# Altium PCB can_12V_step_Ivan.PcbDoc
Units mm, origin at the board's own origin, x right, y up, seen from the top; angles counter-clockwise.
Board outline 55 x 55 mm, 2 copper layers (Top Layer, Bottom Layer); 54 components, 43 nets, 233 pads, 17 vias.
Unrouted connection lines stored in the file: 116.
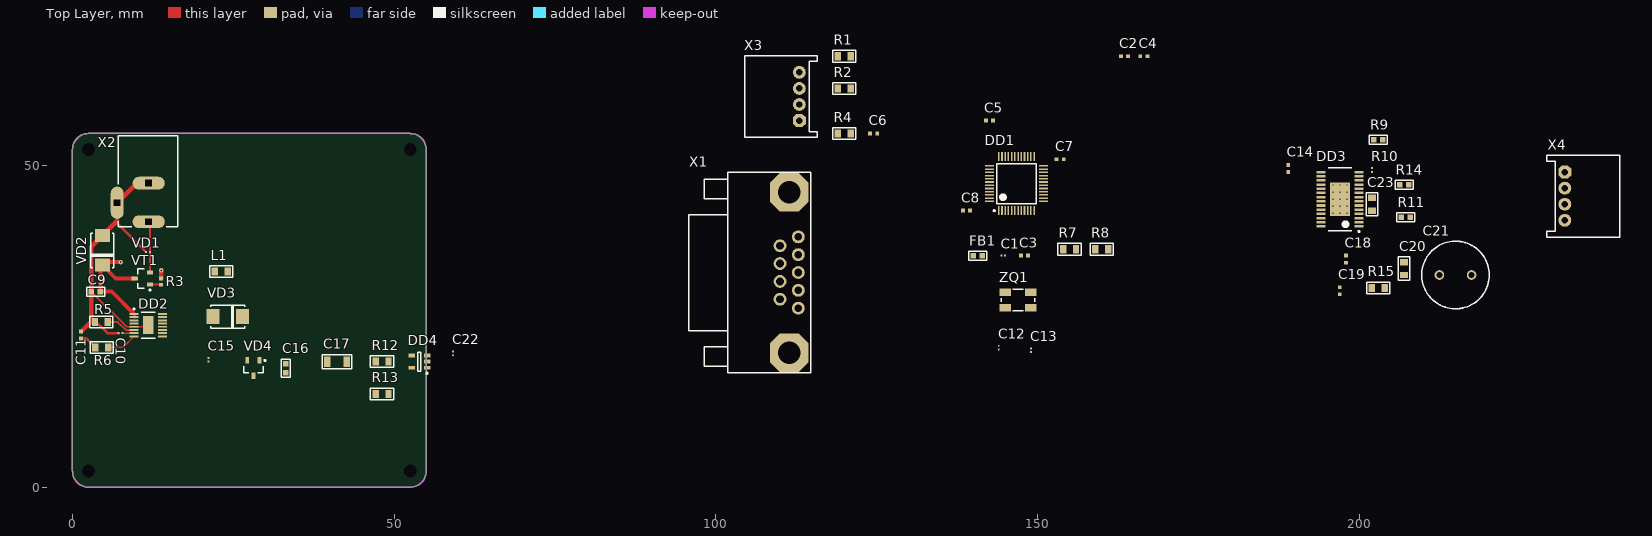
[diagram p0: Top Layer view]
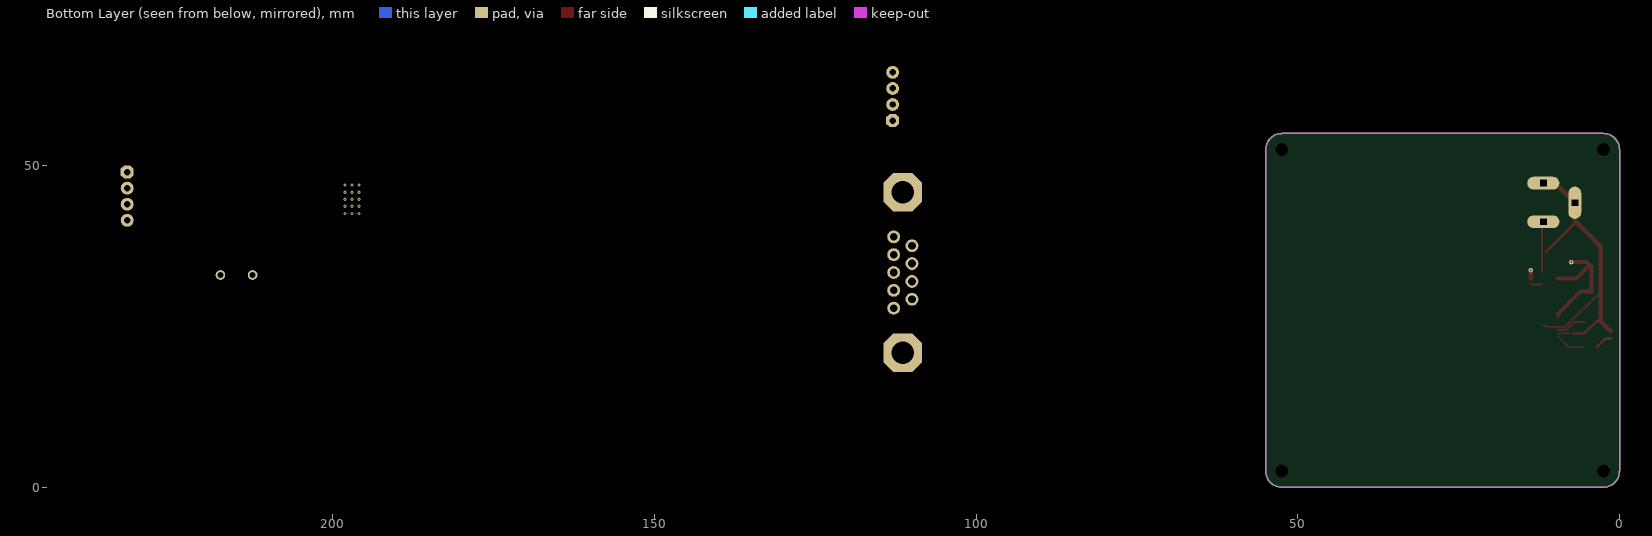
[diagram p1: Bottom Layer view, seen from below]

## Layer stack, top to bottom
Top Solder: solder mask 0.0102, Solder Resist, Dk 3.5
Top Layer: signal copper 0.0356
Dielectric 1: dielectric 0.32, FR-4, Dk 4.8
Bottom Layer: signal copper 0.0356
Bottom Solder: solder mask 0.0102, Solder Resist, Dk 3.5

## Board outline
2.499,0 cw(c2.499,2.492) 0.007,2.492 0,2.5 0,52.5 0,52.501 cw(c2.492,52.501) 2.492,54.993 2.5,55 52.5,55 52.5,54.992 cw(c52.5,52.5) 54.992,52.5 55,52.5 55,2.5 54.992,2.5 cw(c52.5,2.5) 52.5,0.008 52.5,0

## Design rules (kind name [scope] priority, off if disabled: settings)
Clearance [All] p1: gap=0.254 ignorepadtopadclearanceinfootprint=FALSE except(0: Arc-Hole Track-Hole SMDPad-Hole THPad-Hole Via-Hole Fill-Hole Poly-Hole Region-Hole Text-Hole)
PolygonConnect [All] p1: connectstyle=Relief reliefconductorwidth=0.254 reliefentries=4 polygonreliefangle="90 Angle" airgapwidth=0.254
RoutingVias [All] p1: holewidth=0.711 width=1.27 viastyle="Through Hole" minholewidth=0.711 minwidth=1.27 maxholewidth=0.711 maxwidth=1.27
SolderMaskExpansion [All] p1: expansion=0.102
Width [All] p1: maxlimit=1 minlimit=0.25 preferedwidth=0.3
30 further rules are at their usual default settings.

## Components (designator, comment, footprint, x,y, rotation, side; value= is the part's Value field where it differs from the comment)
C1 "Capacitor" CH0201C 144.7,36 r0 top
C2 "Capacitor" CH0402C 163.55,67 r0 top
C3 "Capacitor" CH0402C 148,36 r0 top
C4 "Capacitor" CH0402C 166.55,67 r0 top
C5 "Capacitor" CH0402C 142.55,57 r0 top
C6 "Capacitor" CH0402C 124.55,55 r0 top
C7 "Capacitor" CH0402C 153.55,51 r0 top
C8 "Capacitor" CH0402C 139,43 r0 top
C9 "Capacitor" CH0603C 3.65,30.425 r180 top
C10 "Capacitor" CH0201C 7.45,23.95 r180 top
C11 "Capacitor" CH0402C 1.35,23.675 r90 top
C12 "Capacitor" CH0201C 144,21.7 r90 top
C13 "Capacitor" CH0201C 149,21.3 r90 top
C14 "Capacitor" CH0402C 189,49.55 r90 top
C15 "Capacitor" CH0201C 21.125,19.825 r90 top
C16 "Capacitor" CH0603C 33.125,18.525 r90 top
C17 "Capacitor" CH1206C 41.125,19.525 r0 top
C18 "Capacitor" CH0402C 198,35.45 r90 top
C19 "Capacitor" CH0402C 197,30.55 r90 top
C20 "Capacitor" CH0805C 207,34 r90 top
C21 "Capacitor_Passing" RB5-10.5 215,33 r0 top
C22 "Capacitor" CH0201C 59.125,20.825 r90 top
C23 "Capacitor" CH0805C 202,44 r90 top
DD1 "STM32F103C8T6" "STM32F103 48pins" 146.75,47.2 r90 top
DD2 "LT3697" LT3697 11.775,25.2 r0 top
DD3 "DRV8825" DRV8825 197.05,44.775 r180 top
DD4 "TLV755P" SOT23-5 53.925,19.525 r180 top
FB1 "Ferrite bead" CH0603L 140.7,36 r0 top
L1 "*" CH0805L 23.125,33.525 r0 top
R1 "Res_0.125" CH0805R 120,67 r0 top
R2 "Res_0.125" CH0805R 120,62 r0 top
R3 "Res_0.125" CH0402R 13.775,31.975 r270 top
R4 "Res_0.125" CH0805R 120,55 r0 top
R5 "Res_0.125" CH0805R 4.5,25.675 r180 top
R6 "Res_0.125" CH0805R 4.55,21.75 r180 top
R7 "Res_0.125" CH0805R 155,37 r0 top
R8 "Res_0.125" CH0805R 160,37 r0 top
R9 "Res_0.125" CH0603R 203,54 r0 top
R10 "Res_0.05" CH0201R 202,49.3 r90 top
R11 "Res_1" CH0603R 207.3,42 r0 top
R12 "Res_0.125" CH0805R 48.125,19.525 r0 top
R13 "Res_0.125" CH0805R 48.125,14.525 r0 top
R14 "Res_1" CH0603R 207,47 r180 top
R15 "Res_0.5" CH0805R 203,31 r0 top
VD1 "TVS-diod_simmetrical" CH0201L 11.725,36.575 r0 top
VD2 "TVS-diod_directed" DO214AA 4.65,36.825 r270 top
VD3 "Diod Schottky" DO214AA 24.125,26.525 r0 top
VD4 "Diod Schottky" SOT23_132 28.125,18.525 r270 top
VT1 "*" SOT23_132 10.85,32.45 r180 top
X1 "DB-9" "CON: DB-9F" 111.42,33.385 r0 top
X2 "2_pins" "CON: 163-179PH-EX" 11.85,54.975 r270 top
X3 "4_pins" "CON: CWF-4R" 113,60.75 r90 top
X4 "STEPPER MOTOR" "CON: CWF-4R" 232,45.25 r270 top
ZQ1 "Oscillator" "OSC: 5032" 147,29.1 r0 top

## Footprints (in the part's own frame and the unit in brackets; to place one, negate y for a bottom-side part, rotate by r counter-clockwise, add the part's x,y. Pads: shape width x height; smd on the part's side, far side on the other; paste and mask are expansions set on the pad)
CH0201C [mm]
  rect 0.3x0.3 smd: 1(-0.3,0) 2(0.3,0)
  body extent -0.3,-0.15 0.3,0.15, height 0.31
CH0201L [mm]
  rect 0.3x0.3 smd: 1(-0.3,0) 2(0.3,0)
  body extent -0.3,-0.15 0.3,0.15, height 0.3
CH0201R [mm]
  rect 0.3x0.3 smd: 1(-0.3,0) 2(0.3,0)
  body extent -0.3,-0.15 0.3,0.15, height 0.22
CH0402C [mm]
  rect 0.6x0.6 smd: 1(-0.55,0) 2(0.55,0)
  body extent -0.51,-0.25 0.51,0.25, height 0.51
CH0402R [mm]
  rect 0.6x0.6 smd: 1(-0.5,0) 2(0.5,0)
  body extent -0.52,-0.25 0.47,0.25, height 0.34
CH0603C [mm] "Chip Capacitor, 2-Leads, Body 1,53x0,85mm, IPC Medium Density"
  rect 0.85x0.85 smd: 1(-0.7,0) 2(0.7,0)
  silkscreen extent -1.4,-0.7 1.4,0.7, body extent -0.8,-0.4 0.8,0.4, height 0.3
CH0603L [mm]
  rect 0.85x0.85 smd: 1(-0.7,0) 2(0.7,0)
  silkscreen extent -1.4,-0.7 1.4,0.7, body extent -0.8,-0.4 0.8,0.4, height 0.8
CH0603R [mm]
  rect 0.85x0.85 smd: 1(-0.7,0) 2(0.7,0)
  silkscreen extent -1.4,-0.7 1.4,0.7, body extent -0.8,-0.4 0.8,0.4, height 0.44
CH0805C [mm] "Chip Capacitor, 2-Leads, Body 2,00x1,20mm, IPC Medium Density"
  rect 1x1.25 smd: 1(-1,0) 2(1,0)
  silkscreen extent -1.8,-0.9 1.8,0.9, body extent -1,-0.62 1,0.63, height 0.78
CH0805L [mm]
  rect 1x1.25 smd: 1(-1,0) 2(1,0)
  silkscreen extent -1.8,-0.9 1.8,0.9, body extent -1,-0.62 1,0.63, height 0.85
CH0805R [mm]
  rect 1x1.25 smd: 1(-1,0) 2(1,0)
  silkscreen extent -1.8,-0.9 1.8,0.9, body extent -1,-0.6 1,0.6, height 0.44
CH1206C [mm] "Non polar chip capacitor, size 1206"
  rect 1x1.6 smd: 1(-1.5,0) 2(1.5,0)
  silkscreen extent -2.3,-1.1 2.3,1.1, body extent -1.6,-0.8 1.6,0.8, height 1
"CON: 163-179PH-EX" [mm]
  oval 2x5 hole 1 square: 1(13.7,0) 2(7.7,0)
  oval 5x2 hole 1 square: 2(10.75,-4.9)
  round 0.5 on Mech1: ""(14,-3)
  silkscreen extent 0.3,-4.72 14.5,4.5, body extent 0,-5 14.4,4.4, height 11.05
"CON: CWF-4R" [mm]
  oct 2x2 hole 1: 1(-3.75,0)
  round 2 hole 1: 2(-1.25,0) 3(1.25,0) 4(3.75,0)
  round 0.5 on Mech1: ""(-5.6,-2.2)
  round 0.5 on Top Overlay: ""(-5,-1)
  silkscreen extent -6.38,-2.8 6.35,8.5, body extent -6.25,-2.7 6.25,8.8, height 5.75
"CON: DB-9F" [mm]
  round 2 hole 1.2: 1(1.42,-5.54) 2(1.42,-2.77) 3(1.42,0) 4(1.42,2.77) 5(1.42,5.54) 6(-1.42,-4.155) 7(-1.42,-1.385) 8(-1.42,1.385) 9(-1.42,4.155)
  oct 6x6 hole 3.5: G1(0,12.5) G2(0,-12.5)
  silkscreen extent -15.58,-15.62 3.32,15.62, body extent -15.3,-15.4 3,15.41, height 12.52
DO214AA [mm] "SMB"
  rect 2x2.3 smd: 1(-2.3,0) 2(2.3,0)
  round 0.5 on Mech1: ""(2.1,1.3)
  silkscreen extent -2.67,-1.78 2.67,1.78, body extent -2.7,-1.8 2.7,1.8, height 2.3
DRV8825 [mm] "SOP127P600-8N"
  rect 1.4x0.4 smd: 1(-2.95,4.225) 2(-2.95,3.575) 3(-2.95,2.925) 4(-2.95,2.275) 5(-2.95,1.625) 6(-2.95,0.975) 7(-2.95,0.325) 8(-2.95,-0.325) 9(-2.95,-0.975) 10(-2.95,-1.625) 11(-2.95,-2.275) 12(-2.95,-2.925) 13(-2.95,-3.575) 14(-2.95,-4.225) 15(2.95,-4.225) 16(2.95,-3.575) 17(2.95,-2.925) 18(2.95,-2.275) 19(2.95,-1.625) 20(2.95,-0.975) 21(2.95,-0.325) 22(2.95,0.325) 23(2.95,0.975) 24(2.95,1.625) 25(2.95,2.275) 26(2.95,2.925) 27(2.95,3.575) 28(2.95,4.225)
  rect 3.1x5.18 smd: 29(0,0)
  silkscreen extent -3.08,-4.9 1.85,5.12, body extent -3.2,-4.9 3.2,4.9, height 1.2
LT3697 [mm] "TSSOP, 16-Leads, Body 4,00x3,00mm, Pitch 0,50mm, Thermal Pad 2,80x1,60mm, IPC Medium Density"
  rect 1.4x0.3 smd: 1(-2.2,1.75) 2(-2.2,1.25) 3(-2.2,0.75) 4(-2.2,0.25) 5(-2.2,-0.25) 6(-2.2,-0.75) 7(-2.2,-1.25) 8(-2.2,-1.75) 9(2.2,-1.75) 10(2.2,-1.25) 11(2.2,-0.75) 12(2.2,-0.25) 13(2.2,0.25) 14(2.2,0.75) 15(2.2,1.25) 16(2.2,1.75)
  rect 1.6x2.8 smd: 17(0,0)
  silkscreen extent -2.32,-2 1.1,2.62, body extent -2.44,-2 2.44,2, height 1.1
"OSC: 5032" [mm]
  round 0.5 on Top Overlay: 1(-2.6,-2.2)
  rect 1.8x1.2 smd: 1(-2,-1.2) 2(2,-1.2) 3(2,1.2) 4(-2,1.2)
  round 0.5 on Mech1: ""(-2,-1.1)
  silkscreen extent -2.6,-1.7 2.6,1.7, body extent -2.5,-1.59 2.5,1.59, height 1.1
RB5-10.5 [mm] "Capacitor (Radial); 2 Leads"
  round 1.5 hole 0.9: 1(-2.5,0) 2(2.5,0)
  silkscreen extent -5.25,-5.25 5.25,5.25
SOT23-5 [mm] "SOT23, 5-Leads, Body 2,90x2,80mm, Pitch 0,95mm, IPC Medium Density"
  rect 1x0.6 smd: 1(-1.2,0.95) 2(-1.2,0) 3(-1.2,-0.95) 4(1.2,-0.95) 5(1.2,0.95)
  round 0.5 on Mech1: ""(-1.1,1.1)
  silkscreen extent -1.33,-1.5 0.25,1.92, body extent -1.5,-1.5 1.5,1.5, height 1.3
SOT23_132 [mm] "SOT23, 3-Leads, Body 3,0x2,6mm (max), Pitch 0,95mm, IPC Medium Density"
  rect 1x0.6 smd: 1(-1.2,0.95) 2(-1.2,-0.95) 3(1.2,0)
  round 0.5 on Mech1: ""(-0.9,1.1)
  silkscreen extent -1.32,-1.5 0.7,1.92, body extent -1.32,-1.52 1.32,1.52, height 1.12
"STM32F103 48pins" [mm] "TSQFP, 48-Leads, Body 7,00x7,00mm, Pitch 0,50mm, IPC Medium Density"
  rect 1.4x0.25 smd: 1(-4.2,2.75) 2(-4.2,2.25) 3(-4.2,1.75) 4(-4.2,1.25) 5(-4.2,0.75) 6(-4.2,0.25) 7(-4.2,-0.25) 8(-4.2,-0.75) 9(-4.2,-1.25) 10(-4.2,-1.75) 11(-4.2,-2.25) 12(-4.2,-2.75) 25(4.2,-2.75) 26(4.2,-2.25) 27(4.2,-1.75) 28(4.2,-1.25) 29(4.2,-0.75) 30(4.2,-0.25) 31(4.2,0.25) 32(4.2,0.75) 33(4.2,1.25) 34(4.2,1.75) 35(4.2,2.25) 36(4.2,2.75)
  rect 0.25x1.4 smd: 13(-2.75,-4.2) 14(-2.25,-4.2) 15(-1.75,-4.2) 16(-1.25,-4.2) 17(-0.75,-4.2) 18(-0.25,-4.2) 19(0.25,-4.2) 20(0.75,-4.2) 21(1.25,-4.2) 22(1.75,-4.2) 23(2.25,-4.2) 24(2.75,-4.2) 37(2.75,4.2) 38(2.25,4.2) 39(1.75,4.2) 40(1.25,4.2) 41(0.75,4.2) 42(0.25,4.2) 43(-0.25,4.2) 44(-0.75,4.2) 45(-1.25,4.2) 46(-1.75,4.2) 47(-2.25,4.2) 48(-2.75,4.2)
  silkscreen extent -4.32,-3.1 3.1,3.57, body extent -4.5,-4.5 4.5,4.5, height 1.6

## Part data
C1 C22: Capacitance=1мк, Case=0201, Manufacture="Murata Electronics", Voltage=10В, HelpURL=https://ru.mouser.com/ProductDetail/Murata-Electronics/GRM033C81A105ME05E?qs=sGAEpiMZZMs0AnBnWHyRQN7%2fAA2D2lPPXfhIkJ3ChWM%252bNp28BKy3Ug%3d%3d, Model=GRM033C81A105ME05E
C2: Capacitance=4,7мк, Case=0402, Manufacture="Murata Electronics", Voltage=10В, HelpURL=https://ru.mouser.com/ProductDetail/Murata-Electronics/ZRB15XR61A475KE01D?qs=sGAEpiMZZMs0AnBnWHyRQO9VYadaKTO%252beZnE9zFUsbv4FmCibz4ZfQ%3d%3d, Model=ZRB15XR61A475KE01D
C3: Capacitance=0,01мк, Case=0402, Manufacture=Yageo, Voltage=10В, HelpURL=https://ru.mouser.com/ProductDetail/Yageo/CC0402MRX7R6BB103?qs=sGAEpiMZZMs0AnBnWHyRQCF1lTWZ1EBLC11KxQK9NtY%3D, Model=CC0402MRX7R6BB103
C4 C5 C6 C7 C8 C14: Capacitance=0,1мк, Case=0402, Manufacture=AVX, Voltage=10В, HelpURL=https://ru.mouser.com/ProductDetail/AVX/0402ZD103KAT2A?qs=sGAEpiMZZMs0AnBnWHyRQKdiqyDPVQdAu74W%2fwwRq8A%3d, Model=0402ZD103KAT2A
C9 C16: Capacitance=4,7мк, Case=0603, Manufacture="Murata Electronics", Voltage=16В, HelpURL=https://ru.mouser.com/ProductDetail/Murata-Electronics/GRM188R61C475KAAJD?qs=sGAEpiMZZMs0AnBnWHyRQHS%2f3XE0oMwxE3tFP4oDIiY%3d, Model=GRM188R61C475KAAJD
C10 C15: Capacitance=100, Case=0201, Manufacture=KEMET, Voltage=10В, HelpURL=https://ru.mouser.com/ProductDetail/KEMET/C0201C101K8GACTU?qs=sGAEpiMZZMs0AnBnWHyRQB5KqWiNAtmEn9gsTWOdKS%252b7RrFbxqtALA%3d%3d, Model=C0201C101K8GACTU
C11: Capacitance=330, Case=0402, Manufacture="Vishay / Vitramon", Voltage=10В, HelpURL=https://ru.mouser.com/ProductDetail/Vishay-Vitramon/VJ0402Y331MXQCW1BC?qs=sGAEpiMZZMs0AnBnWHyRQHefeAIkSpb%2fKjIwGvKZvs8%3d, Model=VJ0402Y331MXQCW1BC
C12 C13: Capacitance=30, Case=0201, Manufacture=KEMET, Voltage=10В, HelpURL=https://ru.mouser.com/ProductDetail/KEMET/CBR02C308B8GAC?qs=sGAEpiMZZMs0AnBnWHyRQKJCfzG%2fi9wHnix1yOwfSPhOUzhoHh%252bTpQ%3d%3d, Model=CBR02C308B8GAC
C17: Capacitance=100мк, Case=1206, Manufacture=TDK, Voltage=10В, HelpURL=https://ru.mouser.com/ProductDetail/TDK/C3216X5R1A107M160AC?qs=sGAEpiMZZMs0AnBnWHyRQEWjzA2rN6H9eWVfGykJv7Q%3d, Model=C3216X5R1A107M160AC
C18: Capacitance=0,01мк, Case=0402, Manufacture=Yageo, Voltage=50В, HelpURL=https://ru.mouser.com/ProductDetail/Yageo/AC0402KRX7R9BB103?qs=sGAEpiMZZMs0AnBnWHyRQBZcF7Vf94SCHXtsGWcqG94cFjQPe22zAg%3D%3D, Model=AC0402KRX7R9BB103
C19: Capacitance=0,1мк, Case=0402, Manufacture=Yageo, Voltage=16В, HelpURL=https://ru.mouser.com/ProductDetail/Yageo/CC0402KPX5R7BB104?qs=sGAEpiMZZMs0AnBnWHyRQBZcF7Vf94SC0cALCY4FDZWppIvzFqHKwA%3D%3D, Model=CC0402KPX5R7BB104
C20 C23: Capacitance=0,1мк, Case=0805, Manufacture="Vishay / Sprague", Voltage=20В, HelpURL=https://ru.mouser.com/ProductDetail/Vishay-Sprague/TMCP1D104MTRF?qs=sGAEpiMZZMsh%252B1woXyUXj%252Bp8lp8l%2FqQ2aRrDnwXAyQE%3D, Model=TMCP1D104MTRF
C21: Capacitance=100мк, Case="Bulk 8х12 mm", Manufacture=KEMET, Voltage=20В, HelpURL=https://ru.mouser.com/ProductDetail/KEMET/A755KS107M1DAAE020?qs=sGAEpiMZZMsh%252B1woXyUXj9o1%2FkKtBj0MuWI8g1mDmRQ%3D, Model=A755KS107M1DAAE020
DD1: library part STM32, Case=LQFP48, Manufacture=STMicroelectronics, HelpURL=https://www.st.com/en/microcontrollers-microprocessors/stm32f103c8.html, Model=STM32F103C8T6
DD2: "6~18 to 5", Manufacture="Analog Devices", HelpURL=https://www.analog.com/en/products/lt3697.html, Model=LT3697
DD3: Case=TSSOP, Manufacture="Texas Instruments", HelpURL=http://www.ti.com/product/DRV8825, Model=DRV8825
DD4: library part "LDO +3.3V", Case=SOT-23, Manufacture="Texas Instruments", HelpURL=http://www.ti.com/product/TLV755P?keyMatch=TLV755P&tisearch=Search-EN-Everything, Model=TLV755P
FB1: Case=0603, Manufacture=murata, Max current=2A, HelpURL=https://www.murata.com/en-us/products/productdetail?partno=BLM18PG121SN1%23, Impedance=120, Model=BLM18PG121SN1#
L1: library part Inductor, Case=0805, Inductance=3,3мк, Manufacture="Murata Electronics", Max current=1А, HelpURL=https://ru.mouser.com/ProductDetail/Murata-Electronics/LQM21PZ3R3MGRD?qs=sGAEpiMZZMsg%252by3WlYCkU2iuTbKTbm6Zxs6Ix4GkUPA%3d, Impedance=150м, Model=LQM21PZ3R3MGRD
R1 R2 R4 R5 R6 R7 R8 R12 R13: Case=0805, Manufacture="Panasonic Industrial Devices"
  R1 R2 R4 R7 R8: HelpURL=https://ru.mouser.com/ProductDetail/Panasonic-Industrial-Devices/ERJ-6ENF9091V?qs=sGAEpiMZZMvdGkrng054tx7%2f6%252bNA3LAJZkxjwUnWjWM%3d, Impedance=10К, Model=ERJ-6ENF9091V
  R5: HelpURL=https://ru.mouser.com/ProductDetail/Panasonic-Industrial-Devices/ERJ-6ENF4872V?qs=sGAEpiMZZMvdGkrng054tx7%2f6%252bNA3LAJLLBsBMFOrm0%3d, Impedance=48,7К, Model=ERJ-6ENF4872V
  R6 R12 R13: HelpURL=https://ru.mouser.com/ProductDetail/Panasonic-Industrial-Devices/ERJ-6ENF9091V?qs=sGAEpiMZZMvdGkrng054tx7%2f6%252bNA3LAJZkxjwUnWjWM%3d, Impedance=9,09К, Model=ERJ-6ENF9091V
R3: Case=0402, Manufacture=Yageo, HelpURL=https://ru.mouser.com/ProductDetail/Yageo/AC0402FR-7W10KL?qs=sGAEpiMZZMvdGkrng054txbN%2f5LBcxld3gyqgmBuiXRPLjwmdNqO3A%3d%3d, Impedance=10К, Model=AC0402FR-7W10KL
R9: Case=0603, Manufacture=Yageo, Power=100мВ, HelpURL=https://ru.mouser.com/ProductDetail/Yageo/RT0603BRD0750KL?qs=sGAEpiMZZMtlubZbdhIBIEgN9MQql2m6ewcteVFRdgU%3D, Impedance=50К, Model=RT0603BRD0750KL
R10: Case=0201, Manufacture=Vishay, Power=0,05В, HelpURL=https://ru.mouser.com/ProductDetail/Vishay/CRCW020130K0FNED?qs=sGAEpiMZZMtlubZbdhIBIJshr8wLt%252BurnrZICO32FEA%3D, Impedance=30К, Model=CRCW020130K0FNED
R11 R14: Case=0508, Manufacture="KOA Speer", Power=1Вт, HelpURL=https://ru.mouser.com/ProductDetail/KOA-Speer/WK73S2ATTD1R87F?qs=sGAEpiMZZMtlubZbdhIBIIR71ikvQRXLAqdbfLeoe5g%3D, Impedance=1,87, Model=WK73S2ATTD1R87F
R15: Case=0805, Manufacture="KOA Speer", HelpURL=https://ru.mouser.com/ProductDetail/KOA-Speer/SG73G2ATTD1004D?qs=sGAEpiMZZMvdGkrng054tz1y1XEHv7sNqdEHfKLpAGs6ZpwyMDczVg%3d%3d, Impedance=1М, Model=SG73G2ATTD1004D
VD1: Case=0201, Clamping Voltage=12В, Manufacturer=Littelfuse, HelpURL=https://ru.mouser.com/ProductDetail/Littelfuse/SP3022-01WTG?qs=sGAEpiMZZMsItbzKdwyIez7NGmqnzL8h47KYC2e%252bM%2f4NVETz1A7KGA%3d%3d, Model=SP3022-01WTG
VD2: Case=DO-214AA-2, Clamping_Voltage=12В, Manufacturer=Bourns, HelpURL=https://ru.mouser.com/ProductDetail/Bourns/CD214B-T70ALF?qs=sGAEpiMZZMsItbzKdwyIexL102H4jKkFOiaKL2EcEgo%3d, Model=CD214B-T7.0ALF
VD3: Manufacturer=Rectron, HelpURL=https://ru.mouser.com/ProductDetail/Rectron/FM5822B-W?qs=sGAEpiMZZMtQ8nqTKtFS%2fGuc2LbLh1yNV0sywe9%2fy3k%3d, If=3А, Model=FM5822B-W, Vrrm=40В
VD4: Manufacturer=Toshiba, HelpURL=https://ru.mouser.com/ProductDetail/Toshiba/1SS374TE85LF?qs=sGAEpiMZZMtQ8nqTKtFS%2fOl9H8JU2QXlyYvmz0vcRmull8rlMQPxpQ%3d%3d, If=200мА, Model=1SS374(TE85L,F), Vrrm=15В
VT1: library part P-Channel, Manufacture="Diodes Incorporated", HelpURL=https://ru.mouser.com/ProductDetail/Diodes-Incorporated/DMG2301LK-7?qs=sGAEpiMZZMshyDBzk1%2fWi3VK%2fMVeCy7TGgocA8mg7FfG8rajAhy0Kw%3d%3d, Id=2,4А, Model=DMG2301LK-7, Vgs=300мВ, Vsd=20В
X1: library part 9_pins, 2=CAN_L, 3=GND, 7=CAN_H, HelpURL=https://www.digikey.com/product-detail/en/assmann-wsw-components/A-DS-09-LL-Z/AE10972-ND/1241781, Model=DB-9
X3: Manufacture="Omron Electronics", 1=SWCLK, 2=SWDIO, 3=BOOT0, 4=NRST, HelpURL=https://ru.mouser.com/ProductDetail/Omron-Electronics/XN2D-4471?qs=sGAEpiMZZMvd2mIcYG7oaC0TeQEBnk0JvHtcE4UuDS0%3D, Model=XN2D-4471
X4: library part 4_pins, "Bipolar Stepper Motor 200 Step 0.35A 12VDC", Case="Square - 1.654\" x 1.654\" (42.00mm x 42.00mm)", Manufacture="Adafruit Industries LLC", ManufactureConnector="Omron Electronics", 1=A, 2=C, 3=B, 4=D, HelpURL=https://www.digikey.com/product-detail/en/adafruit-industries-llc/324/1528-1062-ND/5022791, HelpURLConnector=https://ru.mouser.com/ProductDetail/Omron-Electronics/XN2D-4471?qs=sGAEpiMZZMvd2mIcYG7oaC0TeQEBnk0JvHtcE4UuDS0%3D, Model=324, ModelConnector=XN2D-4471
ZQ1: Case=5x3,2mm, Freq=8МГц, Manufacture="CTS Electronic Components", HelpURL=https://ru.mouser.com/ProductDetail/CTS-Electronic-Components/636L3C008M00000?qs=sGAEpiMZZMt8zWNA7msRCjl4WCD9T6KEFNudNQm%252BeAU%3D, Model=636L3C008M00000
X2: HelpURL=https://ru.farnell.com/gct-global-connector-technology/dcj250-10-a-k1-k/dc-power-jack-5a-20vdc-black/dp/2524130?st=power%20jack, Vcc=+12В

## Free pads (board coordinates)
  round 0 hole 2: ""(2.5,2.5) ""(2.5,52.5) ""(52.5,2.5) ""(52.5,52.5)

## Via types
v1: diameter 0.5, hole 0.2, Top Layer to Bottom Layer, 15 vias
v2: diameter 0.7, hole 0.3, Top Layer to Bottom Layer, 2 vias

## Nets (pads, with @x,y where several pads share a name; then routed paths per layer and width w, separated by ;. In a path a pad name is that pad's centre, name@x,y a point inside that pad or via, vN(x,y) a via of type N, cw(c..) or ccw(c..) an arc to the next point about the centre after c; other vN are vias at no path point)
+3,3В: C1.2 C2.2 C3.1 C4.1 C5.1 C7.1 C8.1 C14.1 C22.1 DD1.9 DD1.24 DD1.36 DD1.48 DD3.15 DD4.5 FB1.1 R2.1 R4.1 R7.1 R8.1 R9.2
+5В: C16.1 C17.1 DD2.10 DD2.11 DD2.13 DD4.1 L1.2 R12.1 VD4.1
+12В: C9.1 C19.1 C20.2 C21.1 C23.2 DD2.1 DD2.2 DD3.4 DD3.11 R15.1 VD2.2 VT1.3 | length 20.3
  Top Layer w0.4: DD2.2 DD2.1
  Top Layer w0.6: v2(7.5,35) 5.125,35 VD2.2 ; DD2.1 6.1,30.425 C9.1 4.35,34.225 VD2.2 ; VT1.3 6.725,32.45 VD2.2
GND: C1.1 C2.1 C3.2 C4.2 C5.2 C6.2 C7.2 C8.2 C9.2 C10.2 C11.2 C12.2 C13.2 C14.2 C16.2 C17.2 C20.1 C21.2 C22.2 C23.1 DD1.8 DD1.23 DD1.35 DD1.47 DD2.5 DD2.17 DD3.14 DD3.28 DD4.2 R1.1 R3.1 R5.2 R10.1 R11.1 R13.2 R14.1 VD1.1 VD2.1 VD3.1 X1.3 X2.2 | length 53
  Top Layer w0.3: C9.2 8.425,24.95 DD2.5 11.525,24.95 DD2.17
  Top Layer w0.4: 2.896,26.475 5.421,23.95 C10.2 ; X2.2@6.95,44.225 6.95,41.425 6.95,41.05 VD1.1@11.412,36.588
  Top Layer w0.7: C11.2 2.896,25.771 2.896,26.475 C9.2@2.896,30.479 ; C9.2 C9.2@2.896,30.479 ; 6.95,41.425 VD2.1 2.896,37.371 C9.2@2.896,30.479 ; X2.2@6.95,44.225 10,47.275 X2.2@11.85,47.275 ; R3.1 13.775,33.7 v2(13.8,33.725)
NetC6_1: C6.1 DD1.7 R4.2 X3.4
NetC10_1: C10.1 DD2.7 | length 1.8
  Top Layer w0.25: C10.1 DD2.7
NetC11_1: C11.1 R6.2 | length 2.8
  Top Layer w0.4: C11.1 2.175,23.125 R6.2
NetC12_1: C12.1 DD1.6 ZQ1.1@145,27.9
NetC13_1: C13.1 DD1.5 ZQ1.3
NetC15_1: C15.1 DD2.14 VD4.2
NetC15_2: C15.2 DD2.15 DD2.16 L1.1 VD3.2
NetC18_1: C18.1 DD3.2
NetC18_2: C18.2 DD3.1
NetC19_2: C19.2 DD3.3 R15.2
NetDD1_1: DD1.1 FB1.2
NetDD1_10: DD1.10 DD3.18 R8.2
NetDD1_11: DD1.11 DD3.27 R7.2
NetDD1_13: DD1.13 DD3.24
NetDD1_14: DD1.14 DD3.25
NetDD1_15: DD1.15 DD3.26
NetDD1_16: DD1.16 DD3.22
NetDD1_17: DD1.17 DD3.16
NetDD1_18: DD1.18 DD3.17
NetDD1_19: DD1.19 DD3.19
NetDD1_20: DD1.20 DD3.20
NetDD1_21: DD1.21 DD3.21
NetDD1_32: DD1.32 X1.7
NetDD1_33: DD1.33 X1.2
NetDD1_34: DD1.34 R2.2 X3.2
NetDD1_37: DD1.37 R1.2 X3.1
NetDD1_44: DD1.44 X3.3
NetDD2_6: DD2.6 R5.1 | length 4.6
  Top Layer w0.3: R5.1 7.075,25.675 8.3,24.45 DD2.6
NetDD2_8: DD2.8 R6.1 | length 4.7
  Top Layer w0.25: R6.1 7.875,21.75 DD2.8
NetDD2_12: DD2.12 R12.2 R13.1
NetDD3_5: DD3.5 X4.2
NetDD3_6: DD3.6 R11.2
NetDD3_7: DD3.7 X4.1
NetDD3_8: DD3.8 X4.4
NetDD3_9: DD3.9 R14.2
NetDD3_10: DD3.10 X4.3
NetDD3_12: DD3.12 DD3.13 R9.1 R10.2
NetR3_2: R3.2 VT1.1 | length 1.7
  Top Layer w0.3: VT1.1 13.75,31.5 R3.2
NetVD1_2: VD1.2 VT1.2 X2.1 | length 8
  Top Layer w0.3: X2.1 12.025,41.1 VD1.2 12.025,33.425 VT1.2
pads on no net: DD1.2 DD1.3 DD1.4 DD1.12 DD1.22 DD1.25 DD1.26 DD1.27 DD1.28 DD1.29 DD1.30 DD1.31 DD1.38 DD1.39 DD1.40 DD1.41 DD1.42 DD1.43 DD1.45 DD1.46 DD2.3 DD2.4 DD2.9 DD3.23 DD3.29 DD4. DD4.3 DD4.4 VD2. VD3. VD4. VD4.3 VT1. X1.1 X1.4 X1.5 X1.6 X1.8 X1.9 X1.G1 X1.G2 X2. X3. X4. ZQ1. ZQ1.1@144.4,26.9 ZQ1.2 ZQ1.4
copper on no net:
  other v1: 195.95,42.575 197.05,42.575 198.15,42.575 195.95,43.675 197.05,43.675 198.15,43.675 195.95,44.775 197.05,44.775 198.15,44.775 195.95,45.875 197.05,45.875 198.15,45.875 195.95,46.975 197.05,46.975 198.15,46.975

## Keep-outs
Keep-Out Layer:
  lines w0.2: 0,2.5 0,52.5 ; 0,52.501 cw(c2.492,52.501) 2.492,54.993 ; 0.007,2.492 ccw(c2.499,2.492) 2.499,0 ; 2.5,0 52.5,0 ; 2.5,55 52.5,55 ; 52.5,0.008 ccw(c52.5,2.5) 54.992,2.5 ; 52.5,54.992 cw(c52.5,52.5) 54.992,52.5 ; 55,2.5 55,52.5

## Silkscreen, mask and mechanical layers (free items; w line width, h text height)
Mechanical 1:
  lines w0.2: 0,2.5 0,52.5 ; 2.5,0 52.5,0 ; 2.5,55 52.5,55 ; 55,2.5 55,52.5
  lines w0.254: 0,2.5 ccw(c2.5,2.5) 2.5,0 ; 0,52.5 cw(c2.5,52.5) 2.5,55 ; 52.5,0 ccw(c52.5,2.5) 55,2.5 ; 52.5,55 cw(c52.5,52.5) 55,52.5